# Altium PCB AC_DCConvertor_v2.PcbDoc
Units mil, origin at the board's own origin, x right, y up, seen from the top; angles counter-clockwise.
Board outline 6000 x 4000 mil, 2 copper layers (Top Layer, Bottom Layer); 23 components, 14 nets, 73 pads, 0 vias.
Unrouted connection lines stored in the file: 2.
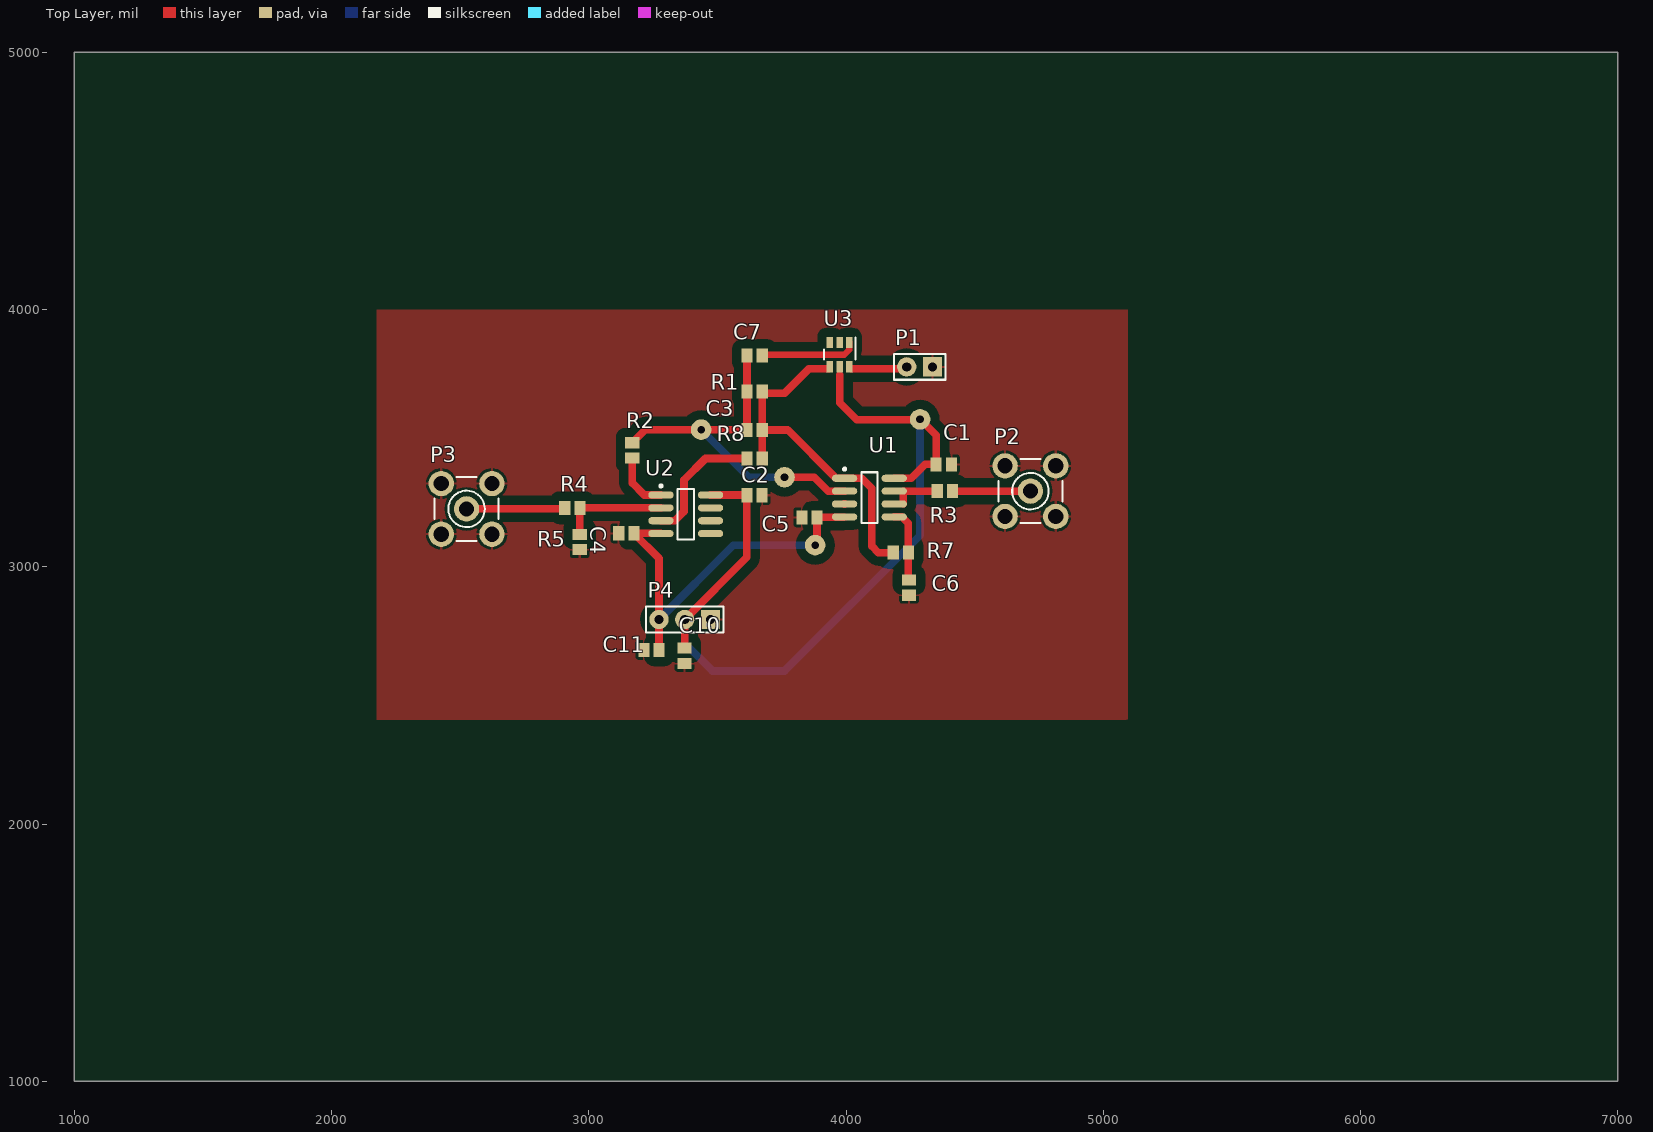
[diagram p0: Top Layer view]
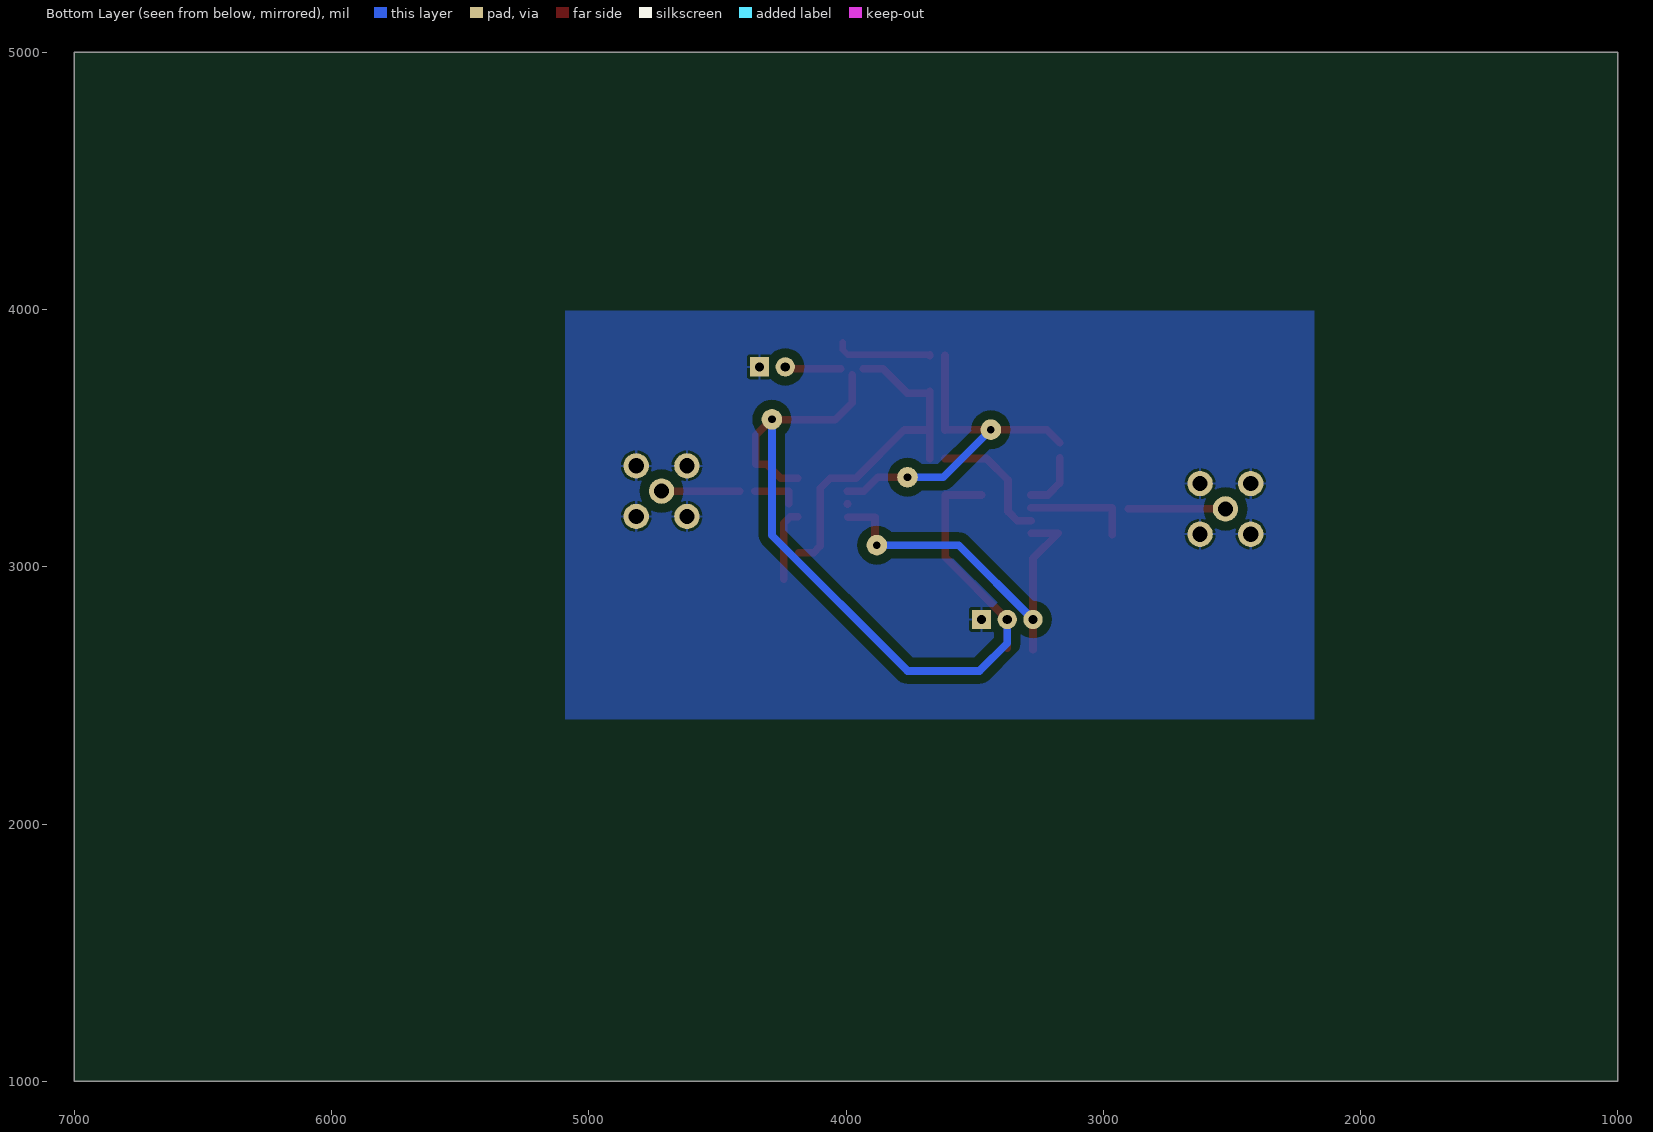
[diagram p1: Bottom Layer view, seen from below]

## Layer stack, top to bottom
Top Solder: solder mask 0.4, Solder Resist, Dk 3.5
Top Layer: signal copper 1.4
Dielectric 1: dielectric 12.6, FR-4, Dk 4.8
Bottom Layer: signal copper 1.4
Bottom Solder: solder mask 0.4, Solder Resist, Dk 3.5

## Board outline
1000,1000 7000,1000 7000,5000 1000,5000

## Design rules (kind name [scope] priority, off if disabled: settings)
Clearance Clearance_1 [InPolygon] p1: gap=35 ignorepadtopadclearanceinfootprint=FALSE
Clearance [All] p2: gap=10 ignorepadtopadclearanceinfootprint=FALSE except(0: Arc-Hole Track-Hole SMDPad-Hole THPad-Hole Via-Hole Fill-Hole Poly-Hole Region-Hole Text-Hole)
PolygonConnect [All] p1: connectstyle=Relief reliefconductorwidth=10 reliefentries=4 polygonreliefangle="90 Angle" airgapwidth=10
RoutingVias [All] p1: holewidth=28 width=50 viastyle="Through Hole" minholewidth=28 minwidth=50 maxholewidth=28 maxwidth=50
SolderMaskExpansion [All] p1: expansion=4
Width [All] p1: maxlimit=40 minlimit=20 preferedwidth=30 bottomlayer_minwidth=30 minimp=50.000000 maximp=50.000000 favimp=50.000000
30 further rules are at their usual default settings.

## Components (designator, comment, footprint, x,y, rotation, side; value= is the part's Value field where it differs from the comment)
C1 "Cap Pol2" C0805 4380,3398 r0 top value=0.1uF
C2 "Cap Pol2" C0805 3644,3278 r0 top value=0.1uF
C3 "Cap Semi" C0805 3645,3532 r0 top value=0.22uF
C4 "Cap Pol2" C0805 3146,3130 r0 top value=0.1uF
C5 "Cap Pol2" C0805 3858,3192 r0 top value=0.1uF
C6 "Cap Semi" C0805 4245,2919 r270 top value=0.01uF
C7 "Cap Semi" C0805 3645,3821 r0 top value=0.001uF
C10 "Cap Pol3" C0805 3372,2654 r270 top value=10uF
C11 "Cap Pol3" C0805 3244,2677 r0 top value=10uF
P1 "Header 2" HDR1X2 4336,3777 r180 top
P2 "SMB" SMB_V-RJ45 4717,3294 r0 top
P3 "SMB" SMB_V-RJ45 2525,3225 r0 top
P4 "Header 3" HDR1X3 3473,2795 r180 top
R1 "Res2" C0805 3645,3681 r0 top value=10M
R2 "Res2" C0805 3169,3452.38 r270 top value=100K
R3 "Res2" C0805 4384,3294 r0 top value=1K
R4 "Res2" C0805 2936,3229 r0 top value=1K
R5 "Res2" C0805 2965,3096 r90 top value=100K
R7 "Res2" C0805 4213,3055 r0 top value=100K
R8 "Res2" C0805 3645,3421 r180 top value=1K
U1 "OPA2277UG4" TI-D8_M 4091,3269 r0 top
U2 "TLC372" SO8_M 3377,3204 r0 top
U3 "TS5A3159DBVR" DBV0006A_N 3975,3825 r270 top value=Value

## Footprints (in the part's own frame and the unit in brackets; to place one, negate y for a bottom-side part, rotate by r counter-clockwise, add the part's x,y. Pads: shape width x height; smd on the part's side, far side on the other; paste and mask are expansions set on the pad)
C0805 [mm] "Chip Capacitor, Body 2.0x1.3mm, IPC High Density"
  rect 1.1x1.4 smd: 1(-0.75,0) 2(0.75,0)
  body extent -1.1,-0.72 1.1,0.72, height 1.4
DBV0006A_N [mm]
  rect 1.1x0.65 smd paste+0 mask+0.051: 1(-1.2,0.95) 2(-1.2,0) 3(-1.2,-0.95) 4(1.2,-0.95) 5(1.2,0) 6(1.2,0.95)
  silkscreen extent -1.68,-1.55 0.5,1.55
HDR1X2 [mm] "Connector; Header; 2 Position"
  rect 1.905x1.905 hole 0.9: 1(0,0)
  round 1.905 hole 0.9: 2(2.54,0)
  silkscreen extent -1.27,-1.27 3.81,1.27
HDR1X3 [mm] "Connector; Header; 3 Position"
  rect 1.905x1.905 hole 0.9: 1(0,0)
  round 1.905 hole 0.9: 2(2.54,0) 3(5.08,0)
  silkscreen extent -1.27,-1.27 6.35,1.27
SMB_V-RJ45 [mm] "Connector; SMB Straight"
  round 2.5 hole 1.5: 1(0,0) 2(-2.5,-2.5) 2(-2.5,2.5) 2(2.5,-2.5) 2(2.5,2.5)
  silkscreen extent -3.15,-3.15 3.15,3.15
SO8_M [mm] "SOIC, 8-Leads, Body 4.9x3.9mm, Pitch 1.27mm, IPC Low Density"
  oval 2.5x0.7 smd: 1(-2.45,1.905) 2(-2.45,0.635) 3(-2.45,-0.635) 4(-2.45,-1.905) 5(2.45,-1.905) 6(2.45,-0.635) 7(2.45,0.635) 8(2.45,1.905)
  silkscreen extent -2.57,-2.5 0.8,2.93, body extent -2,-2.5 2,2.5, height 1.75
TI-D8_M [mm] "SOIC, 8-Leads, Body 4.9x3.9mm, Pitch 1.27mm, IPC Low Density"
  oval 2.5x0.7 smd: 1(-2.45,1.905) 2(-2.45,0.635) 3(-2.45,-0.635) 4(-2.45,-1.905) 5(2.45,-1.905) 6(2.45,-0.635) 7(2.45,0.635) 8(2.45,1.905)
  silkscreen extent -2.57,-2.5 0.8,2.93, body extent -2,-2.5 2,2.5, height 1.75

## Part data
C1 C2 C4 C5: "Polarized Capacitor (Axial)", LatestRevisionDate=17-Jul-2002, LatestRevisionNote="Re-released for DXP Platform.", PackageDescription="Polarized Capacitor; 2 Leads", PackageReference=POLAR0.8, Published=8-Jun-2000, Publisher="Altium Limited"
C3 C6 C7: "Capacitor (Semiconductor SIM Model)", LatestRevisionDate=29-May-2009, LatestRevisionNote="IPC-7351 Footprint Added.", PackageDescription="Chip Capacitor", PackageReference=C1206, Published=8-Jun-2000, Publisher="Altium Limited"
C10 C11: "Polarized Capacitor (Surface Mount)", LatestRevisionDate=29-May-2009, LatestRevisionNote="IPC-7351 Footprint Added.", PackageDescription="Chip Capacitor", PackageReference=C0805, Published=8-Jun-2000, Publisher="Altium Limited"
P1: "Header, 2-Pin", LatestRevisionDate=17-Jul-2002, LatestRevisionNote="Re-released for DXP Platform.", Publisher="Altium Limited"
P2 P3: "SMB Straight Connector", LatestRevisionDate=17-Jul-2002, LatestRevisionNote="Re-released for DXP Platform.", Publisher="Altium Limited"
P4: "Header, 3-Pin", LatestRevisionDate=17-Jul-2002, LatestRevisionNote="Re-released for DXP Platform.", Publisher="Altium Limited"
R1 R2 R3 R4 R5 R7 R8: "Resistor", LatestRevisionDate=17-Jul-2002, LatestRevisionNote="Re-released for DXP Platform.", PackageDescription="Axial Device, Thru-Hole; 2 Leads; 0.4 in Pin Spacing", PackageReference=AXIAL-0.4, Published=8-Jun-2000, Publisher="Altium Limited"
U1: "High Precision Operational Amplifier, 4 to 36 V, -40 to 85 degC, 8-pin SOIC (D8), Green (RoHS & no Sb/Br)", Manufacturer="Texas Instruments", Rating=Catalog, Supplier Part Number 1=OPA2277UG4-ND, Total Supply Voltage(Max)(+5V is 5, +/-5V is 10)=36, Total Supply Voltage(Min)(+5V is 5, +/-5V is 10)=4, CMRR(Min)(dB)=130, Code_JEDEC=MS-012, ComponentLink1Description="Manufacturer URL", ComponentLink1URL=http://www.ti.com/, ComponentLink2Description=Datasheet, ComponentLink2URL=http://www.ti.com/lit/ds/symlink/opa2277.pdf, ComponentLink3Description="Package Specification", ComponentLink3URL=http://www.ti.com/litv/pdf/msoi002j, DatasheetVersion=SBOS079A, Eco-Plan="Green (RoHS & no Sb/Br)", GBW(Typ)(MHz)=1, IIB(Max)(pA)=1000, Iq per channel(Max)(mA)=0.825, Mounting Technology="Surface Mount", Number of Channels=2, Offset Drift(Typ)(uV/C)=0.1, PackageDescription="8-Pin Plastic Small Outline, Body 4.9 x 3.9 mm, Pitch 1.27 mm", PackageReference=D8, PackageVersion="4040047-3/M, 06/2011", Packing=TUBE, PartNumber=OPA2277UG4, Slew Rate(Typ)(V/us)=0.8, Sub Family="High Supply Voltage Amplifier (>=30V), Low Noise Amp (<=10nV/rtHz), Low Offset Voltage Amplifier (<=500uV), Precision Amplifier", Supplier 1=Digi-Key, Supplier 2=Newark, Supplier 3=Mouser, Supplier Part Number 2=80K2644, Supplier Part Number 3=595-OPA2277UG4, Vio (25C)(Max)(mV)=0.025
U3: "Imported", Alternate PartNumber=TS5A3159DBVT, Manufacturer="Texas Instruments", CompType=IC, MountType=SMT, PackageReference=DBV0006A, PartNumber=TS5A3159DBVR, PIN_COUNT=6, RefDes=RefDes, RoHS=Y, Type=DEV

## Free pads (board coordinates)
  round 80 hole 30: 6(4288,3573) 7(3880,3084) 8(3437,3533) 8(3761,3348)

## Nets (pads, with @x,y where several pads share a name; then routed paths per layer and width w, separated by ;. In a path a pad name is that pad's centre, name@x,y a point inside that pad or via, vN(x,y) a via of type N, cw(c..) or ccw(c..) an arc to the next point about the centre after c; other vN are vias at no path point)
+5: C1.1 C2.1 C10.1 P4.2 pad.6 U1.8 U2.8 U3.5 | length 3374.1
  Top Layer w30: C10.1@3373,2684.53 P4.2 3614.47,3036.47 C2.1 ; U2.8 C2.1@3613.47,3279 ; 3976,3747 3976,3638 4042,3572 pad.6@4273,3572 ; U1.8 4254,3344 4308,3398 C1.1 4350.47,3510.53 pad.6
  Bottom Layer w30: P4.2 3373,2703 3481,2595 3761,2595 4288,3122 pad.6
-5: C4.2 C5.2 C11.2 P4.3 pad.7 U1.4 U2.4 | length 1529.1
  Top Layer w30: C11.2@3273,2677.53 P4.3 3273,3032.53 C4.2 U2.4@3279.54,3130 ; pad.7@3887.53,3091.53 C5.2 U1.4@3992.54,3192
  Bottom Layer w30: P4.3 3562,3084 pad.7
GND: C1.2 C2.2 C4.1 C5.1 C6.2 C10.2 C11.1 P1.1 P2.2 P3.2 P4.1 R5.1 U1.3 U3.2 | length 0.6
  Top Layer w30: U1.3 U1.3@3994.54,3244.56
NetC3_1: C3.1 C7.1 pad.8 R1.1 R2.1 U1.2 | length 1410.8
  Top Layer w30: R2.1 3219.09,3532 ; 3220.09,3533 3437,3533 C3.1@3614.47,3533 ; C3.1 R1.1 C7.1 ; pad.8@3761,3348 3877,3348 3931,3294 U1.2
  Bottom Layer w30: pad.8@3437,3533 3622,3348 pad.8@3761,3348
NetC3_2: C3.2 R1.2 R7.1 R8.1 U1.1 U3.4 | length 1394.6
  Top Layer w30: R8.1 C3.2 ; R1.2 R1.2@3674.53,3675 ; U3.4@3932,3770 3856,3770 3761,3675 R1.2@3674.53,3675 ; R7.1 4126,3055 4100,3081 4100,3305 4061,3344 U1.1 3961,3344 3773,3532 C3.2 ; C3.2 R1.2@3674.53,3675
NetC6_1: C6.1 R7.2 U1.5 | length 283.1
  Top Layer w30: U1.5 4217,3194 4242.53,3168.47 R7.2 C6.1@4242.53,2951
NetC7_2: C7.2 U3.1 | length 378
  Top Layer w25: C7.2@3674.53,3824.41 3993.43,3824.41 4012.4,3843.38 U3.1
  Top Layer w30: C7.2 C7.2@3674.53,3824.41
NetP1_2: P1.2 U3.6 | length 218.3
  Top Layer w30: U3.6@4020.55,3770 4229,3770 P1.2
NetP2_1: P2.1 R3.2 | length 303.5
  Top Layer w30: R3.2 P2.1
NetP3_1: P3.1 R4.1 | length 377.5
  Top Layer w30: P3.1 R4.1@2902.47,3225
NetR2_2: R2.2 U2.1 | length 227.5
  Top Layer w30: R2.2@3169,3422.47 3169,3326 3216,3279 U2.1
NetR3_1: R3.1 U1.6 U1.7 | length 181
  Top Layer w30: U1.6@4222.46,3245 4222.46,3294 R3.1
NetR4_2: R4.2 R5.2 U2.2 | length 418
  Top Layer w30: R5.2 R4.2@2965,3228.47 ; R4.2 U2.2
NetR8_2: R8.2 U2.3 | length 506.6
  Top Layer w30: U2.3 3334,3179 3370,3215 3370,3337 3454,3421 R8.2
pads on no net: U2.5 U2.6 U2.7 U3.3

## Polygon pours and split planes (outlines as drawn)
GND on Bottom Layer "Top Layer-No Net" (solid, remove dead copper, pour order 10): 2180,3995 5092,3995 5092,2407 2180,2407
GND on Top Layer "Top Layer-No Net" (solid, remove dead copper, pour order 14): 2175,4000 5095,4000 5095,2400 5090,2405 2175,2405

## Other copper
Top Layer:
  pour cut-out: 3437.17,3332.85 3474.89,3370.57 3670.48,3370.57 3690.89,3350.16 3690.89,3318.45 3688.19,3315.76 3452.04,3315.76 3439.59,3328.2